# EAGLE board neojoint1-000 (EAGLE 6.6.0)
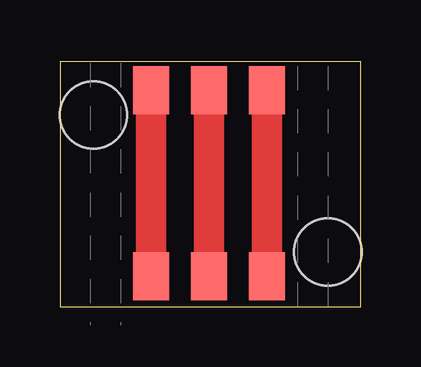
[diagram p0: board, top side]

Size 12.55 x 10.21 mm. Coordinates in mm from the lower left corner, seen from the top.
Outline: 0,0 12.55,0 12.55,10.21 0,10.21 0,0
Copper layers (1*16): Top 0.035mm / dielectric 1.5mm / Bottom 0.035mm
Design rules "default": minimum track width 10mil, minimum drill 24mil, track to track 8mil, track to pad 8mil, pad to pad 8mil, via to via 8mil, smd to smd 8mil, copper to edge 40mil, drill to drill 8mil, minimum pad ring 10mil, minimum via ring 8mil, stop-mask expansion 4mil, vias tented up to drill 0mil, thermal gap 10mil
Holes 2.8 mm at 1.4,8 11.18,2.29

## Footprints (pad centres in the part's own frame; a part is rotated, then mirrored left to right if it is on the bottom)
PAD-1.5X4.5 = smd 1.5 x 2: P$1 0,0

## Placement (x,y rotation side)
J1  [PAD-1.5X4.5]  8.64,1.27 0 top
J2  [PAD-1.5X4.5]  6.22,1.27 0 top
J3  [PAD-1.5X4.5]  3.81,9.02 0 top
J4  [PAD-1.5X4.5]  8.64,9.02 0 top
J5  [PAD-1.5X4.5]  6.22,9.02 0 top
J6  [PAD-1.5X4.5]  3.81,1.27 0 top

## Library data of the parts
J1-J6 = SparkFun-Connectors

## Nets
A: J1.P$1 J4.P$1
B: J2.P$1 J5.P$1
C: J3.P$1 J6.P$1

## Tracks (layer width: path | path; a pad name or v marks a point on that pad's centre or on a via)
A
  Top 1.27: J4.P$1 8.76,8.89 8.64,8.76 J1.P$1 8.76,1.4
B
  Top 1.27: J5.P$1 J2.P$1
C
  Top 1.27: J3.P$1 3.68,8.89 3.81,8.76 J6.P$1 3.68,1.4

## Text on the board
tDocu: neojoint1-000